# Altium PCB Mathis.PcbDoc
Units mm, origin at the board's own origin, x right, y up, seen from the top; angles counter-clockwise.
Board outline 70 x 50 mm, 4 copper layers (Top Layer, VCC, GND, Bottom Layer), stack 0.603 mm thick; 90 components, 67 nets, 353 pads, 95 vias.
Unrouted connection lines stored in the file: 33.
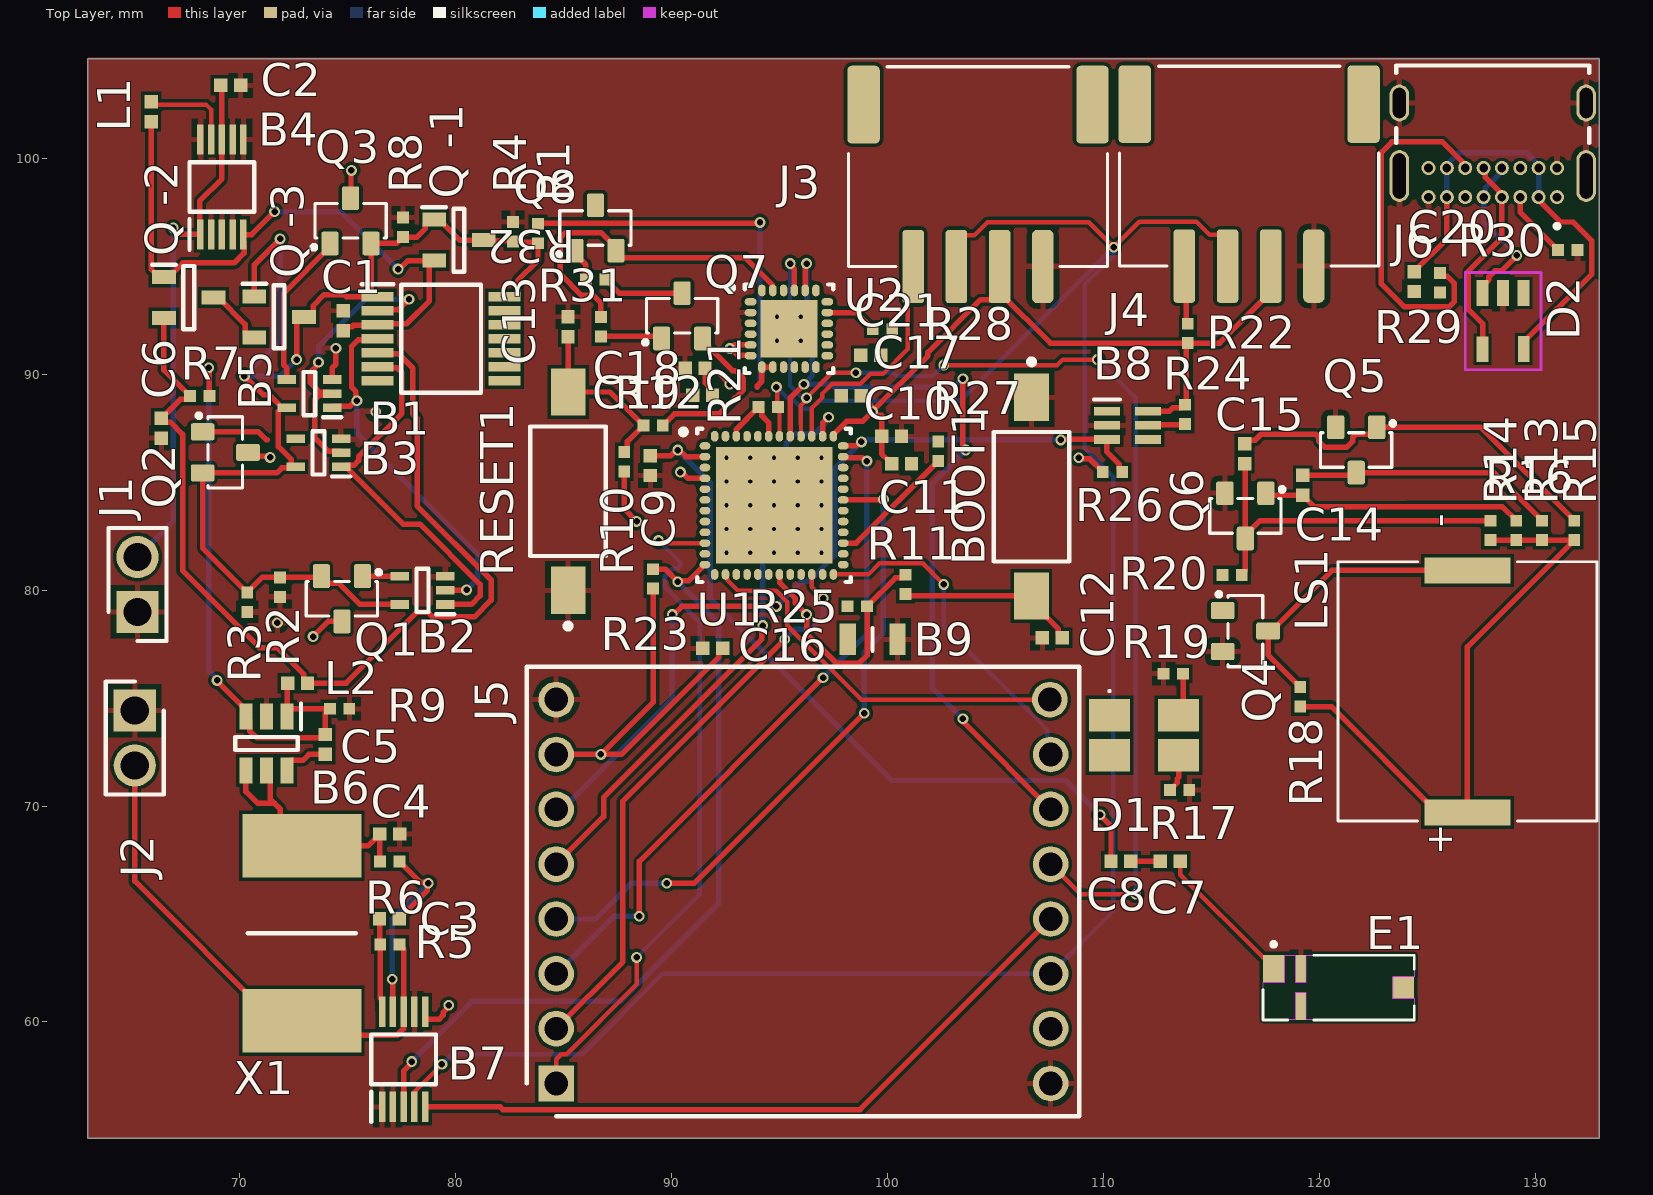
[diagram p0: Top Layer view]
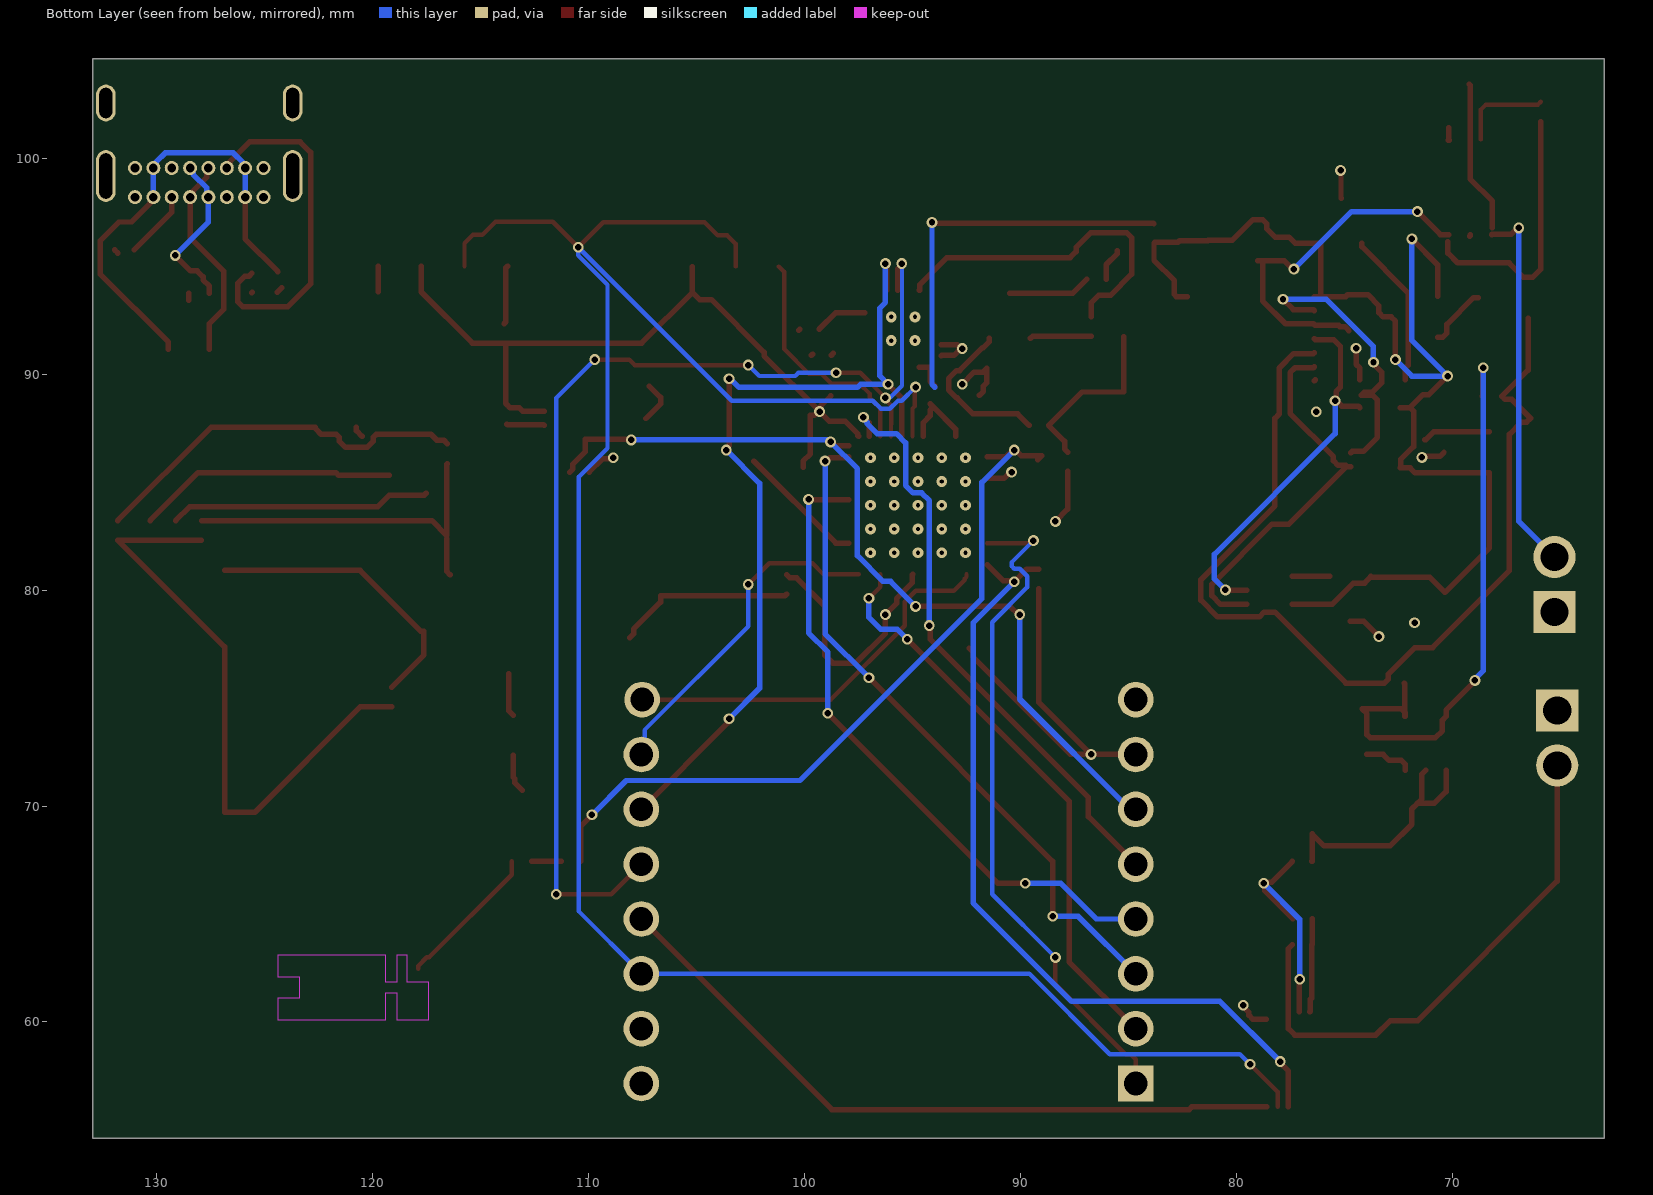
[diagram p1: Bottom Layer view, seen from below]
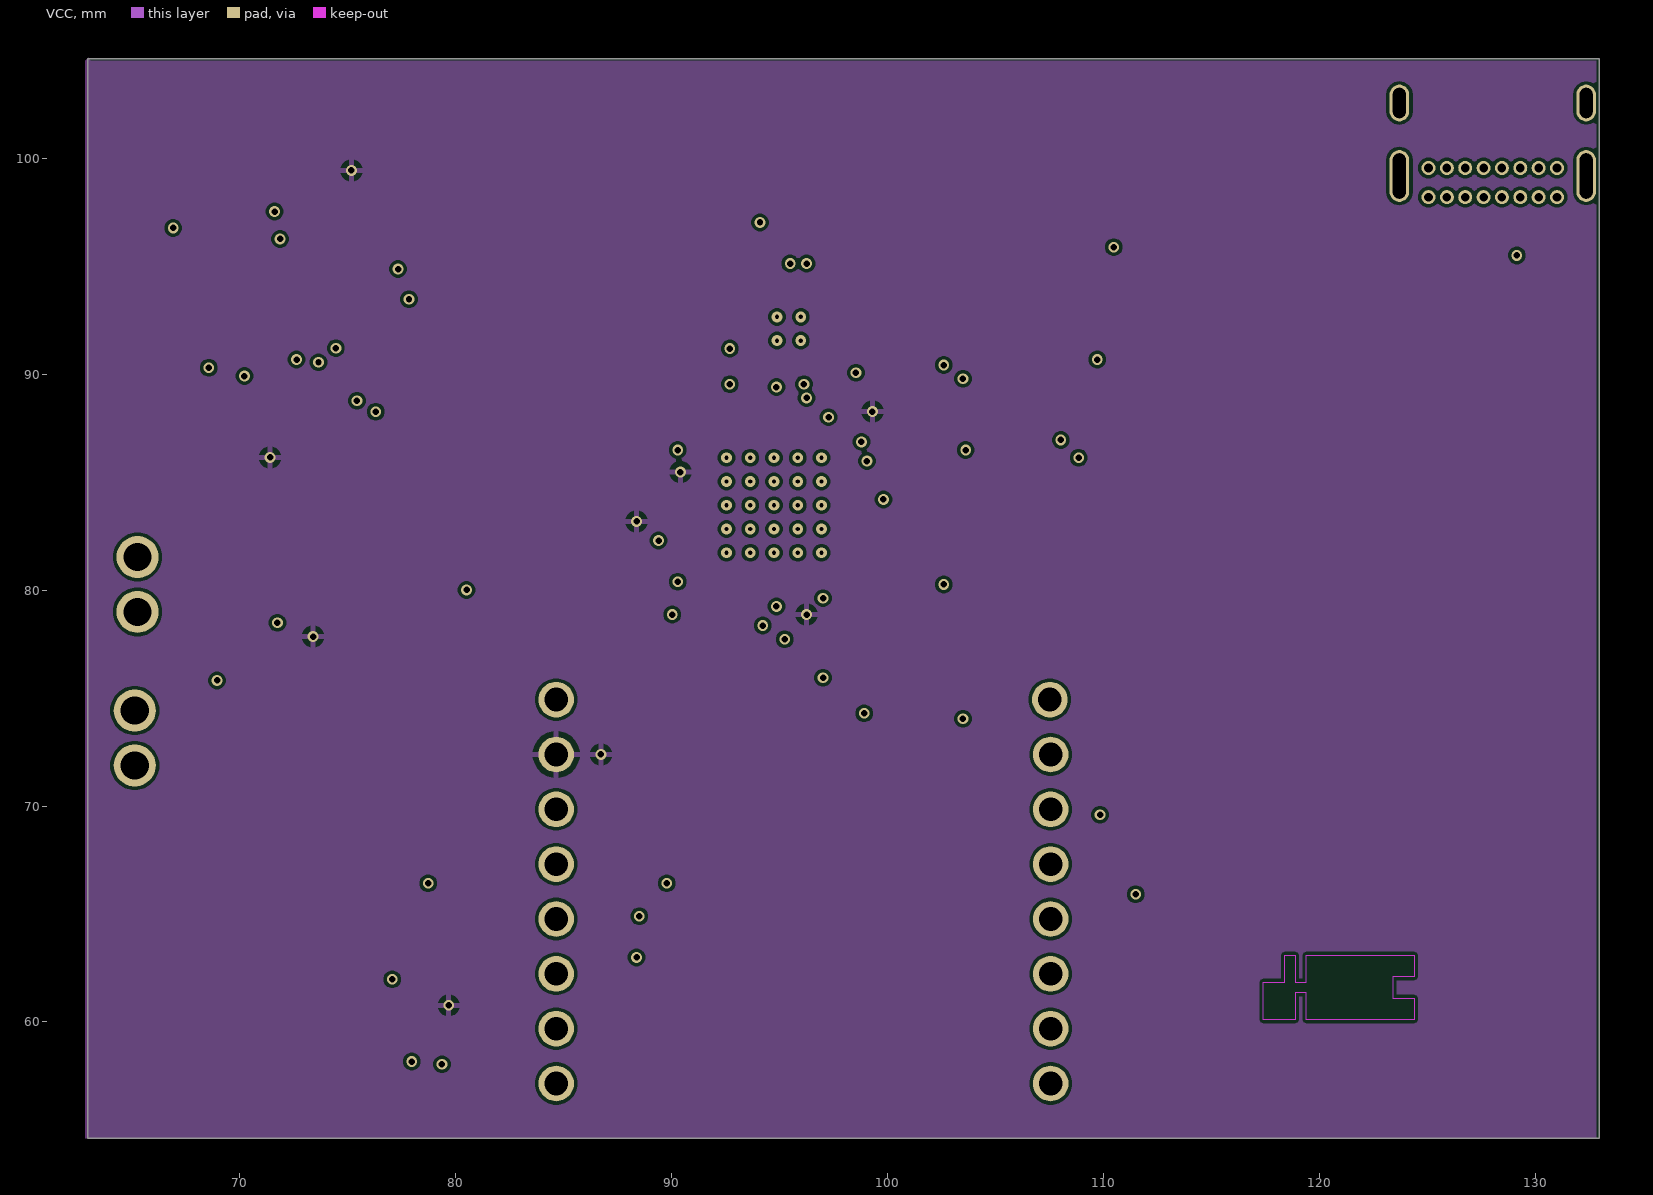
[diagram p2: VCC]
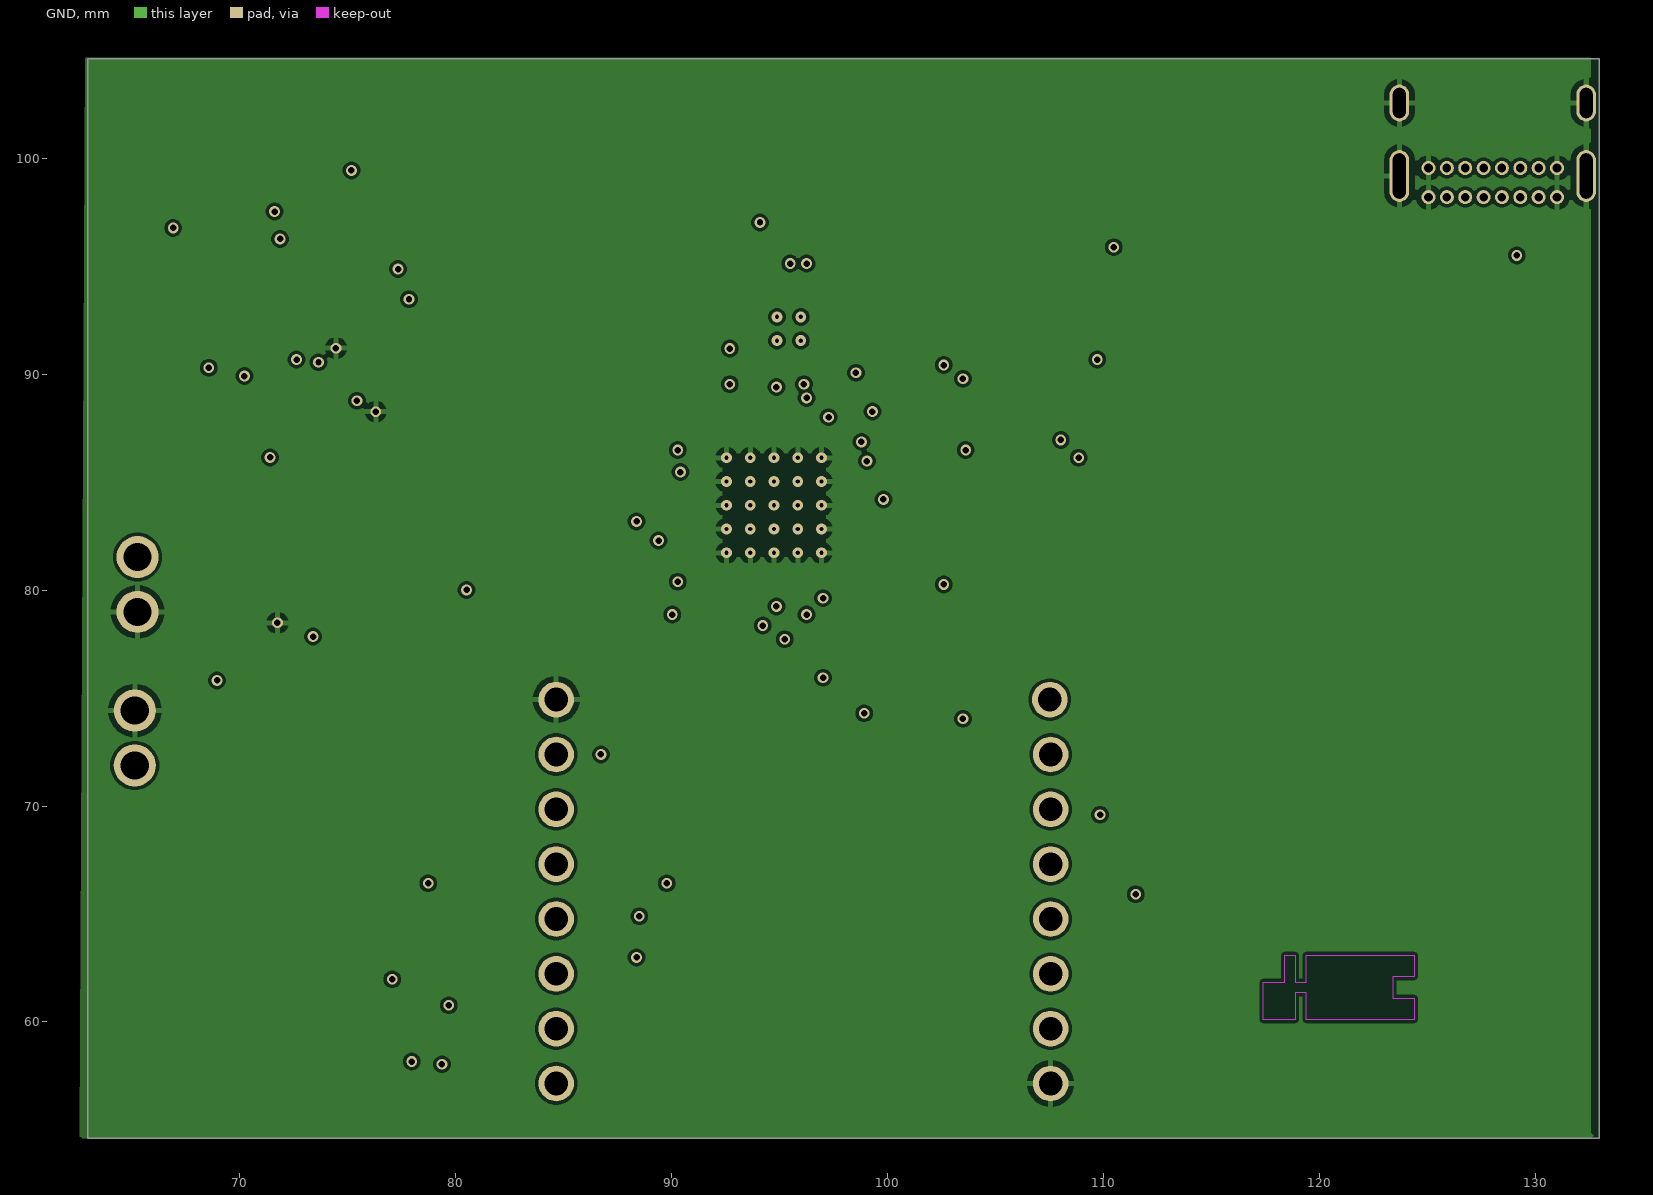
[diagram p3: GND]

## Layer stack, top to bottom
Top Solder: solder mask 0.0102, Solder Resist, Dk 3.5
Top Layer: signal copper 0.0356
Dielectric 2: prepreg 0.0711, PP-006, Dk 4.1
VCC: signal copper 0.035
Dielectric 1: dielectric 0.32, FR-4, Dk 4.8
GND: signal copper 0.035
Dielectric 3: prepreg 0.0711, PP-006, Dk 4.1
Bottom Layer: signal copper 0.0356
Bottom Solder: solder mask 0.0102, Solder Resist, Dk 3.5

## Board outline
62.969,54.61 62.969,104.61 132.969,104.61 132.969,54.61

## Design rules (kind name [scope] priority, off if disabled: settings)
Clearance Clearance_OLTTTPPP [OnOutside] p1: gap=0.15 ignorepadtopadclearanceinfootprint=TRUE
Clearance Clearance_ILTTTPPP [All] p2: gap=0.15 ignorepadtopadclearanceinfootprint=TRUE except(0.2: Arc-Hole Track-Hole SMDPad-Hole THPad-Hole Via-Hole Fill-Hole Poly-Hole Region-Hole)
HoleSize [All] p1: absolutevalues=TRUE maxlimit=1000 minlimit=0.25 maxpercent=80.000 minpercent=20.000
HoleToHoleClearance HoleToHoleClearance_uVia_same_layer_inner [IsMicroVia and ((StartLayer = 'Inner 1') and (StopLayer = 'Inner 2')) vs IsMicroVia and ((StartLayer = 'Inner 1') and (StopLayer = 'Inner 2'))] p1: gap=0.2 allowstackedmicrovias=FALSE
HoleToHoleClearance HoleToHoleClearance_uVia_same_layer_top [IsMicroVia and ((StartLayer = 'Top Layer') and (StopLayer = 'Inner 1')) vs IsMicroVia and ((StartLayer = 'Top Layer') and (StopLayer = 'Inner 1'))] p2: gap=0.2 allowstackedmicrovias=FALSE
HoleToHoleClearance HoleToHoleClearance_uVia [IsMicroVia vs IsMicroVia] p3: gap=0.01 allowstackedmicrovias=FALSE
HoleToHoleClearance [All] p4: gap=0.2 allowstackedmicrovias=FALSE
MinimumAnnularRing MinimumAnnularRing_uVia [IsMicroVia] p1: minimumring=0.09
MinimumAnnularRing MinimumAnnularRing_OAR [OnOutside] p2: minimumring=0.125
MinimumAnnularRing MinimumAnnularRing_IAR [All] p3: minimumring=0.125
PolygonConnect [All] p1: connectstyle=Relief reliefconductorwidth=0.254 reliefentries=4 polygonreliefangle="90 Angle" airgapwidth=0.254
RoutingVias RoutingVias_uVia [IsMicroVia] p1: holewidth=0.1 width=0.28 viastyle="Through Hole" minholewidth=0.1 minwidth=0.28 maxholewidth=0.1 maxwidth=0.28
RoutingVias [All] p2: holewidth=0.35 width=0.6 viastyle="Through Hole" minholewidth=0.25 minwidth=0.5 maxholewidth=3 maxwidth=3.25
SolderMaskExpansion [All] p1: expansion=0 istentingtop=FALSE
ViasUnderSMD [IsMicroVia] p1: allowed=TRUE
Width Width_ILTW [All] p1: maxlimit=3 minlimit=0.15 preferedwidth=0.15
28 further rules are at their usual default settings.

## Classes and differential pairs
component class UART: C18 C19 C20 C21 D2 Q7 Q8 R27 R28 R29 R30 R31 R32 U2
component class SPI: B8 B9 C17 R24 R25 R26
component class I2C: B7 C16 J3 J4 J5 R21 R22 R23
component class HIM: BOOT1 C12 C13 C14 C15 D1 LS1 Q4 Q5 Q6 R10 R11 R12 R13 R14 R15 R16 R17 R18 R19 R20 RESET1
component class ESP: C10 C11 U1
component class ANTENNE: C7 C8 C9 E1
component class ALIM_MOSFET: B1 B2 B3 B4 B5 B6 C1 C2 C3 C4 C5 C6 J1 J2 L1 L2 Q1 Q2 Q3 "Q -1" "Q -2" "Q -3" R1 R2 R3 R4 R5 R6 R7 R8 R9 X1

## Components (designator, comment, footprint, x,y, rotation, side; value= is the part's Value field where it differs from the comment)
B1 "74VHC05FT" SOP65P640X120-14N 79.336,91.644 r0 top
B2 "MC74VHC1GT08DFT2G" SOT65P210X110-5N 78.476,79.988 r180 top
B3 "MC74VHC1GT08DFT2G" SOT65P210X110-5N 73.66,86.36 r180 top
B4 "TPS62056DGSG4" SOP50P490X110-10N 69.184,98.67 r90 top
B5 "MC74VHC1GT08DFT2G" SOT65P210X110-5N 73.24,89.104 r180 top
B6 "LMR50410Y3FQDBVRQ1" SOT95P280X145-6N 71.247,72.898 r270 top
B7 "INA237AIDGST" SOP50P490X110-10N 77.602,58.27 r90 top
B8 "TMP126DCKR" SOT65P210X110-6N 111.125,87.63 r0 top
B9 "NB12K00103JBB" RESC2212X50N 99.321,77.724 r0 top
BOOT1 "FSMSM" TECO-FSMSM-2_V 106.68,84.328 r270 top
C1 "22uF" CAPC1005X06N 74.805,92.48 r90 top
C2 "2,2uF" CAPC1005X06N 69.596,103.378 r0 top
C3 "50uF" CAPC1005X06N 76.945,64.789 r0 top
C4 "2,2uF" CAPC1005X06N 76.962,68.707 r0 top
C5 "0,1uF" CAPC1005X06N 73.966,72.852 r270 top
C6 "10uF" CAPC1005X06N 66.382,87.501 r270 top
C7 "0,9pF" CAPC1005X06N 113.109,67.437 r180 top
C8 "0,6pF" CAPC1005X06N 110.823,67.437 r180 top
C9 "1pF" CAPC1005X06N 89.025,85.772 r90 top
C10 "10uF/6.3V(10%)" CAPC1005X06N 100.2,87.122 r180 top
C11 "0.1uF/6.3V(10%)" CAPC1005X06N 100.663,85.852 r180 top
C12 "1uF" CAPC1005X06N 107.647,77.787 r180 top
C13 "1uF" CAPC1005X06N 85.217,92.202 r90 top
C14 "0.01µF" CAPC1005X06N 119.24,84.856 r270 top
C15 "0.01µF" CAPC1005X06N 116.554,86.318 r270 top
C16 "100nF" CAPC1005X06N 91.914,77.304 r180 top
C17 "0.1µF" CAPC1005X06N 98.331,89.002 r180 top
C18 "1.5uF" CAPC1005X06N 91.101,90.277 r180 top
C19 "0.1uF" CAPC1005X06N 91.449,89.023 r180 top
C20 "1uF" CAPC1005X06N 124.399,94.291 r270 top
C21 "4.7uF" CAPC1005X06N 99.231,90.879 r0 top
D1 "598-8610-207F" 5988610207F 111.895,73.276 r0 top
D2 "824011" 824011 128.524,92.456 r180 top
E1 "NN03-320" XCVR_NN03-320 120.904,61.595 r180 top
J1 "61300211121" 61300211121 65.278,78.994 r90 top
J2 "61300211121" 61300211121 65.151,74.422 r270 top
J3 "114020164" 114020164 104.204,98.787 r180 top
J4 "114020164" 114020164 116.761,98.808 r180 top
J5 "825433-8" Connect-Mikrobus 84.669,57.15 r90 top
J6 "Use" USB4085-GF-A 128.043,102.562 r180 top
L1 "10uF" LQPC1005X06N 68.707,99.362 r270 top
L2 "3,3uH" LQPC1005X06N 75.486,78.486 r0 top
LS1 "PKLCS1212E40A1-R1" SPKR_PKLCS1212E40A1-R1 126.873,75.311 r90 top
Q1 "BSS123" BSS123 74.746,79.601 r180 top
Q2 "BSS123" BSS123 69.345,86.38 r270 top
Q3 "BSS123" BSS123 75.145,97.105 r0 top
Q4 "SS8050-G" SS8050-G 116.586,78.105 r270 top
Q5 "SS8050-G" SS8050-G 121.719,86.494 r180 top
Q6 "SS8050-G" SS8050-G 116.586,83.439 r180 top
Q7 "SS8050-G" SS8050-G 90.499,92.706 r0 top
Q8 "SS8050-G" SS8050-G 86.487,96.774 r0 top
"Q -1" "FDV304P" SOT95P251X112-3N 80.165,96.208 r0 top
"Q -2" "FDV304P" SOT95P251X112-3N 67.652,93.549 r0 top
"Q -3" "FDV304P" SOT95P251X112-3N 71.836,92.66 r0 top
R1 "2K" RESC1005X06N 83.825,96.517 r270 top
R2 "1K" RESC1005X06N 71.882,80.137 r270 top
R3 "10K" RESC1005X06N 70.358,79.444 r270 top
R4 "10K" RESC1005X06N 82.671,96.603 r90 top
R5 "50ohm" RESC1005X06N 76.968,63.585 r180 top
R6 "50ohm" RESC1005X06N 76.962,67.437 r0 top
R7 "10K" RESC1005X06N 68.163,88.984 r0 top
R8 "10K" RESC1005X06N 77.574,96.804 r90 top
R9 "90K" RESC1005X06N 74.637,74.506 r0 top
R10 "10kΩ" RESC1005X06N 87.821,85.947 r270 top
R11 "10kΩ" RESC1005X06N 100.838,80.264 r90 top
R12 "0Ω" RESC1005X06N 89.154,87.63 r0 top
R13 "510Ω" RESC1005X06N 130.318,82.767 r270 top
R14 "20kΩ" RESC1005X06N 129.134,82.767 r270 top
R15 "20kΩ" RESC1005X06N 131.818,82.767 r270 top
R16 "510Ω" RESC1005X06N 127.939,82.767 r270 top
R17 "150Ω" RESC1005X06N 113.538,70.739 r180 top
R18 "1kΩ" RESC1005X06N 119.126,75.057 r270 top
R19 "150Ω" RESC1005X06N 113.25,76.13 r0 top
R20 "1kΩ" RESC1005X06N 115.969,80.709 r180 top
R21 "2kΩ" RESC1005X06N 94.49,88.483 r0 top
R22 "2kΩ" RESC1005X06N 113.919,91.89 r90 top
R23 "10kΩ" RESC1005X06N 89.154,80.518 r90 top
R24 "10kΩ" RESC1005X06N 113.792,88.138 r90 top
R25 "10kΩ" RESC1005X06N 98.617,79.255 r180 top
R26 "10kΩ" RESC1005X06N 110.432,85.471 r180 top
R27 "4.7k" RESC1005X06N 102.362,86.429 r90 top
R28 "10k" RESC1005X06N 99.781,92.083 r0 top
R29 "5.1k" RESC1005X06N 125.603,94.234 r270 top
R30 "5.1k" RESC1005X06N 131.514,95.758 r0 top
R31 "10k" RESC1005X06N 86.741,92.202 r270 top
R32 "10k" RESC1005X06N 86.491,94.395 r180 top
RESET1 "FSMSM" TECO-FSMSM-2_V 85.217,84.582 r90 top
U1 "ESP32-PICO-D4" PQFN50P700X700X104_HS-49N 94.758,83.929 r0 top
U2 "CP2104-F03-GM" PQFN50P400X400X80_HS-25N 95.448,92.106 r0 top
X1 "PSR400ITQFF0L50" RESC10052X200N 72.889,64.106 r90 top

## Footprints (in the part's own frame and the unit in brackets; to place one, negate y for a bottom-side part, rotate by r counter-clockwise, add the part's x,y. Pads: shape width x height; smd on the part's side, far side on the other; paste and mask are expansions set on the pad)
824011 [mil] "Suppresseurs ESD / diodes TVS WE-TVS High Speed 5uA 5VDC 2+1"
  rect 21.65x47.24 smd: 1(-37.4,-51.18) 2(0,-51.18) 3(37.4,-51.18) 4(37.4,51.18) 5(-37.5,51)
  Top Layer keep-out lines w5: 68.9,88.58 68.9,-88.58 -68.9,-88.58 -68.9,88.58 68.9,88.58
  body extent -57,-55 57,55, height 57
114020164 [mm]
  rrect50% 1x3.4 smd: 1(-3,3.8)
  rrect30% 1x3.4 smd: 2(-1,3.8) 3(1,3.8) 4(3,3.8)
  rrect26% 1.5x3.6 smd: MP1(-5.3,-3.7) MP2(5.3,-3.7)
  silkscreen extent -6,-5.45 6,3.8, body extent -6.1,-5.59 5.9,4.59, height 5.2
5988610207F [mm]
  rect 1.9x1.5 smd: 1(-1.6,0.925) 2(1.6,0.925) 3(-1.6,-0.925) 4(1.6,-0.925)
  silkscreen extent -1.65,2 -1.55,2.1, body extent -1.6,-1.35 1.6,1.35, height 0.9
61300211121 [mm] "Embases et logements de câbles WR-PHD 2.54mm 2Pin T HT Header"
  rect 1.95x1.95 / inner round 1.95 / far side rect 1.95x1.95 hole 1.3: 1(0,0)
  round 1.95 hole 1.3: 2(2.54,0)
  silkscreen extent -1.35,-1.35 3.89,1.35
BSS123 [mm]
  rrect25% 0.8x1.1 smd paste+0 mask+0.075: 1(-0.95,-1.05) 2(0.95,-1.05) 3(0,1.05)
  silkscreen extent -1.77,-1.3 1.65,0.8, body extent -1.5,-1.3 1.5,1.3, height 1.1
CAPC1005X06N [mm] "Chip Capacitor, 2-Leads, Body 1,00x0,50mm, IPC Medium Density"
  rect 0.62x0.62 smd: 1(-0.46,0) 2(0.46,0)
  body extent -0.53,-0.28 0.53,0.28, height 0.55
Connect-Mikrobus [mm]
  rect 1.65x1.65 / inner round 1.65 / far side rect 1.65x1.65 hole 1.1: 1(0,0)
  round 1.65 hole 1.1: 2(2.54,0) 3(5.08,0) 4(7.62,0) 5(10.16,0) 6(12.7,0) 7(15.24,0) 8(17.78,0) 9(17.78,-22.86) 10(15.24,-22.9) 11(12.7,-22.9) 12(10.16,-22.9) 13(7.62,-22.9) 14(5.08,-22.9) 15(2.54,-22.9) 16(0,-22.9)
  silkscreen extent -1.52,-24.22 19.3,1.37, body extent -1.37,-24.18 19.14,1.28, height 6.7
LQPC1005X06N [mm]
  rect 0.62x0.62 smd: 1(-3.254,-2.794) 2(-2.334,-2.794)
  body extent -3.32,-3.07 -2.27,-2.52, height 0.55
PQFN50P400X400X80_HS-25N [mm] "PQFN, 24-Leads, Body 4,00x4,00mm, Pitch 0,50mm, Thermal Pad 2,65x2,65mm, IPC Medium Density"
  oval 0.55x0.35 smd: 1(-1.775,1.25) 2(-1.775,0.75) 3(-1.775,0.25) 4(-1.775,-0.25) 5(-1.775,-0.75) 6(-1.775,-1.25) 13(1.775,-1.25) 14(1.775,-0.75) 15(1.775,-0.25) 16(1.775,0.25) 17(1.775,0.75) 18(1.775,1.25)
  oval 0.35x0.55 smd: 7(-1.25,-1.775) 8(-0.75,-1.775) 9(-0.25,-1.775) 10(0.25,-1.775) 11(0.75,-1.775) 12(1.25,-1.775) 19(1.25,1.775) 20(0.75,1.775) 21(0.25,1.775) 22(-0.25,1.775) 23(-0.75,1.775) 24(-1.25,1.775)
  rect 2.65x2.65 smd: 25(0,0)
  silkscreen extent -2.82,-2.05 2.05,2.05, body extent -2.05,-2.05 2.05,2.05, height 0.8
PQFN50P700X700X104_HS-49N [mm] "PQFN, 48-Leads, Body 7,00x7,00mm, Pitch 0,50mm, Thermal Pad 5,40x5,40mm, IPC Medium Density"
  oval 0.5x0.35 smd: 1(-3.2,2.75) 2(-3.2,2.25) 3(-3.2,1.75) 4(-3.2,1.25) 5(-3.2,0.75) 6(-3.2,0.25) 7(-3.2,-0.25) 8(-3.2,-0.75) 9(-3.2,-1.25) 10(-3.2,-1.75) 11(-3.2,-2.25) 12(-3.2,-2.75) 25(3.2,-2.75) 26(3.2,-2.25) 27(3.2,-1.75) 28(3.2,-1.25) 29(3.2,-0.75) 30(3.2,-0.25) 31(3.2,0.25) 32(3.2,0.75) 33(3.2,1.25) 34(3.2,1.75) 35(3.2,2.25) 36(3.2,2.75)
  oval 0.35x0.5 smd: 13(-2.75,-3.2) 14(-2.25,-3.2) 15(-1.75,-3.2) 16(-1.25,-3.2) 17(-0.75,-3.2) 18(-0.25,-3.2) 19(0.25,-3.2) 20(0.75,-3.2) 21(1.25,-3.2) 22(1.75,-3.2) 23(2.25,-3.2) 24(2.75,-3.2) 37(2.75,3.2) 38(2.25,3.2) 39(1.75,3.2) 40(1.25,3.2) 41(0.75,3.2) 42(0.25,3.2) 43(-0.25,3.2) 44(-0.75,3.2) 45(-1.25,3.2) 46(-1.75,3.2) 47(-2.25,3.2) 48(-2.75,3.2)
  rect 5.4x5.4 smd: 49(0,0)
  silkscreen extent -4.32,-3.55 3.55,3.55, body extent -3.55,-3.55 3.55,3.55, height 1.04
RESC1005X06N [mm] "Chip Resistor, 2-Leads, Body 1,00x0,50mm, IPC Medium Density"
  rect 0.55x0.55 smd: 1(-0.45,0) 2(0.45,0)
  body extent -0.53,-0.28 0.53,0.28, height 0.55
RESC2212X50N [mm]
  rect 0.75x1.45 smd: 1(-1.15,0) 2(1.15,0)
  silkscreen extent 0,-0.53 0,0.53, body extent -1.07,-0.63 1.07,0.63, height 0.5
RESC10052X200N [mm]
  rect 2.95x5.5 smd: 1(-4.05,0) 2(4.05,0)
  silkscreen extent 0,-2.5 0,2.5, body extent -5,-2.6 5,2.6, height 2
SOP50P490X110-10N [mm]
  rect 1.4x0.3 smd: 1(-2.2,1) 2(-2.2,0.5) 3(-2.2,0) 4(-2.2,-0.5) 5(-2.2,-1) 6(2.2,-1) 7(2.2,-0.5) 8(2.2,0) 9(2.2,0.5) 10(2.2,1)
  silkscreen extent -2.9,-1.5 1.15,1.5, body extent -2.46,-1.5 2.46,1.5, height 1.06
SOP65P640X120-14N [mm]
  rect 1.475x0.45 smd: 1(-2.938,1.95) 2(-2.938,1.3) 3(-2.938,0.65) 4(-2.938,0) 5(-2.938,-0.65) 6(-2.938,-1.3) 7(-2.938,-1.95) 8(2.938,-1.95) 9(2.938,-1.3) 10(2.938,-0.65) 11(2.938,0) 12(2.938,0.65) 13(2.938,1.3) 14(2.938,1.95)
  silkscreen extent -3.67,-2.5 1.85,2.52, body extent -3.1,-2.75 3.3,2.75, height 1.1
SOT65P210X110-5N [mm]
  rect 0.85x0.4 smd: 1(-1.05,0.65) 2(-1.05,0) 3(-1.05,-0.65) 4(1.05,-0.65) 5(1.05,0.65)
  silkscreen extent -1.48,-1 0.28,1.1, body extent -0.95,-1 1.15,1, height 1.1
SOT65P210X110-6N [mm]
  rect 1.2x0.4 smd: 1(-0.95,0.65) 2(-0.95,0) 3(-0.95,-0.65) 4(0.95,-0.65) 5(0.95,0) 6(0.95,0.65)
  silkscreen extent -1.55,1.2 -0.35,1.2, body extent -1.05,-1 1.05,1, height 1
SOT95P251X112-3N [mm]
  rect 1.1x0.65 smd: 1(-1.15,0.95) 2(-1.15,-0.95) 3(1.15,0)
  silkscreen extent -1.7,-1.46 0.25,1.53, body extent -1.25,-1.46 1.25,1.46, height 1.12
SOT95P280X145-6N [mm]
  rect 1.2x0.6 smd: 1(-1.25,0.95) 2(-1.25,0) 3(-1.25,-0.95) 4(1.25,-0.95) 5(1.25,0) 6(1.25,0.95)
  silkscreen extent -1.85,-1.45 0.3,1.6, body extent -1.4,-1.45 1.4,1.45, height 1.2
SPKR_PKLCS1212E40A1-R1 [mm]
  rect 1.2x4 smd: N(5.6,0) P(-5.6,0)
  silkscreen extent -6,-6 6,6, body extent -6,-6 6,6, height 3
SS8050-G [mm]
  rrect25% 0.8x1.1 smd paste+0 mask+0.075: 1(-0.95,-1.05) 2(0.95,-1.05) 3(0,1.05)
  silkscreen extent -1.77,-1.3 1.65,0.8, body extent -1.5,-1.3 1.5,1.3, height 1.1
TECO-FSMSM-2_V [mm] "SMD, 2-Leads, Body 6x3.5mm, Pitch 9.19mm"
  rect 2.2x1.6 smd: 1(-4.595,0)
  rect 2.18x1.6 smd: 2(4.595,0)
  silkscreen extent -6.37,-1.75 3,1.75, body extent -4.98,-1.75 4.98,1.75, height 4.4
USB4085-GF-A [mm]
  round 0.65 hole 0.4: A1(-2.975,4.36) A4(-2.125,4.36) A5(-1.275,4.36) A6(-0.425,4.36) A7(0.425,4.36) A8(1.275,4.36) A9(2.125,4.36) A12(2.975,4.36) B1(2.975,3.01) B4(2.125,3.01) B5(1.275,3.01) B6(0.425,3.01) B7(-0.425,3.01) B8(-1.275,3.01) B9(-2.125,3.01) B12(-2.975,3.01)
  oval 0.9x1.7 hole 0.6 slot 1.4 at 90 deg: S1(-4.325,0) S2(4.325,0)
  oval 0.9x2.4 hole 0.6 slot 2.1 at 90 deg: S3(-4.325,3.38) S4(4.325,3.38)
  silkscreen extent -4.47,-1.74 4.47,5.8, body extent -4.47,-4.25 4.47,4.92, height 3.46
XCVR_NN03-320 [mm]
  rect 1x1 smd: 1(-3,0)
  rect 0.5x1.25 smd: 2(1.75,-0.875) 4(1.75,0.875)
  rect 1x1.25 smd: 3(3,-0.875)
  Keep-Out Layer region: 3.5,-0.25 2.5,-0.25 2.5,-1.5 2,-1.5 2,-0.25 1.5,-0.25 1.5,-1.5 -3.5,-1.5 -3.5,-0.5 -2.5,-0.5 -2.5,0.5 -3.5,0.5 -3.5,1.5 1.5,1.5 1.5,0.25 2,0.25 2,1.5 3.5,1.5
  silkscreen extent -3.5,-2.1 3.5,1.5, body extent -3.5,-1.5 3.5,1.5, height 2.02

## Part data
B1: "Logic Gates CMOS LOGIC IC INVERTER", Manufacturer_Name=Toshiba, Mouser Part Number=757-74VHC05FT, Manufacturer_Part_Number=74VHC05FT
B2 B3 B5: "Single 2-Input AND Gate, TTL Level", Manufacturer_Name=onsemi, Manufacturer_Part_Number=MC74VHC1GT08DFT2G
B4: "TEXAS INSTRUMENTS - TPS62056DGSG4 - Synchronous Buck (Step Down) Switching Regulator, Fixed, 2.7V-10Vin, 3.3V/0.8A out, 850kHz, VSSOP-10", Manufacturer_Name="Texas Instruments", Mouser Part Number=595-TPS62056DGSG4, Manufacturer_Part_Number=TPS62056DGSG4
B6: "Régulateurs de tension de commutation Automotive qualified SIMPLE SWITCHER 4-V to 36-V, 1-A synchronous step-down converter 6-SOT-23 -40 to 150", Manufacturer_Name="Texas Instruments", Mouser Part Number=595-R50410Y3FQDBVRQ1, Manufacturer_Part_Number=LMR50410Y3FQDBVRQ1
B7: "Current Sense Amplifiers 85-V, 16-bit, I2C output current/voltage/power monitor with alert 10-VSSOP -40 to 125", Manufacturer_Name="Texas Instruments", Mouser Part Number=595-INA237AIDGST, Manufacturer_Part_Number=INA237AIDGST
B8: "Board Mount Temperature Sensors +/-0.25 C SPI temperature sensor with 175 C operation, CRC and slew-rate alert", Manufacturer_Name="Texas Instruments", Mouser Part Number=595-TMP126DCKR, Manufacturer_Part_Number=TMP126DCKR
B9: "NTC SMD Thermistor, NB12K, 10K, 5% AVX 10k 0805 Protection NTC Thermistor, 5s, 2 x 1.25 x 1.3mm", Manufacturer_Name="Kyocera AVX", Mouser Part Number=581-NB12K00103JBB, Arrow Part Number=NB12K00103JBB, Arrow Price/Stock=https://www.arrow.com/en/products/nb12k00103jbb/avx, Datasheet Link=https://datasheet.datasheetarchive.com/originals/distributors/Datasheets-DGA6/551314.pdf, Geometry.Height=0.5mm, Manufacturer_Part_Number=NB12K00103JBB, Mouser Price/Stock=https://www.mouser.co.uk/ProductDetail/AVX/NB12K00103JBB/?qs=4%252B6%252BTdINQeDPvI%252BQUQjJ3Q%3D%3D
BOOT1 RESET1: library part CMP-2000-07511-1, "FSMSM Push Button Switch, 50 mA, -35 to 85 degC, 2-Pin SMD, RoHS, Bulk", Case\/Package=SMD/SMT, Contact Current Rating=50mA, Contact Resistance=100mOhm, Manufacturer="TE Connectivity", Max Operating Temperature=85degC, Max Voltage Rating (DC)=12V, Min Operating Temperature=-35degC, Operating Force=180gf, Package Description="2-Pin Surface Mount Device, Body 6 x 3.5 mm, Pitch 9.19 mm", Package Quantity=1000, Voltage Rating (DC)=24V, Actuator Length=1.07mm, Actuator Material=Polyamide, Contact Material=Brass, Contact Plating=Silver, Current Rating=50mA, Datasheet URL=http://www.te.com/commerce/DocumentDelivery/DDEController?Action=showdoc&DocId=Customer+Drawing%7F1437566-3%7FC2%7Fpdf%7FEnglish%7FENG_CD_1437566-3_C2_1437566_3_1_c.dwg.pdf%7F1437566-3, Datasheet Version="Rev. C2, 08/2014", Electrical Life=20000Cycles, ELV=Compliant, Illumination Type=Illuminated, Lead Free=LeadFree, Manufacturer URL=http://www.te.com/, Mechanical Life=20000Cycles, Mount=SurfaceMount, Mounting Technology=SurfaceMount, Orientation=Straight, Package Reference=FSMSM, Packaging=LoosePiece, REACH SVHC=Unknown, RoHSCompliant=true, Switch Travel=0.25mm, Termination=GullWing, Throw Configuration=SPST
C1 C2 C3 C4 C5 C6 C7 C8 C9 C10 C11 C12 C13 C14 C15 C16 C17 C18 C19 C20 C21: library part Capacitor
D1: "Standard LEDs - SMD Red/Green WC 80/50mcd 645/570nm", Manufacturer_Name=Dialight, Mouser Part Number=645-598-8610-207F, Arrow Part Number=598-8610-207F, Arrow Price/Stock=https://www.arrow.com/en/products/598-8610-207f/dialight?region=nac, Datasheet Link=https://media.digikey.com/pdf/Data%20Sheets/Dialight%20PDFs/598%20Series%201210%20Pkg%20Bi-Color.pdf, Geometry.Height=0.8mm, Manufacturer_Part_Number=598-8610-207F, Mouser Price/Stock=https://www.mouser.co.uk/ProductDetail/Dialight/598-8610-207F?qs=7JStj%2FjQ2SFuCjosqwklHQ%3D%3D
D2: "TVS Diode Array WE-TVS, High Speed Series  - Low capazity - No leakage current - Low clamping voltage - high ESD voltage protection  -- USB 1.0 - 2.0"
E1: "Dual port antenna booster for GNSS, Bluetooth, 5G and UWB (1561 - 1606MHz, 2400 - 2500MHz, 3400 - 3800MHz, 3100 - 4800MHz and 6000 - 10600 MHz), signal booster", Manufacturer_Name=Ignion, Mouser Part Number=128-NN03-320, Manufacturer_Part_Number=NN03-320
J1 J2: "WURTH ELEKTRONIK - 61300211121 - HEADER, 2.54MM, PIN, THT, VERTICAL, 2WAY"
J3 J4: "Seeed Studio Accessories Grove Female Header - SMD-4P-2.0mm-90D-20Pcs", Manufacturer_Name="Seeed Studio", Mouser Part Number=713-114020164, Manufacturer_Part_Number=114020164
J5: library part Connect-Mikrobus, "Headers & Wire Housings 8P double for connection mikrobus", Manufacturer_Name="TE Connectivity", Mouser Part Number=571-825433-8, Manufacturer_Part_Number=825433-8
J6: library part USB4085-GF-A, "Connecteurs USB USB Type C, 2.0, Rec, TH , G/F, RA , Top Mnt, T & R"
L1 L2: library part Bobine
LS1: "Buzzers Transducer, Externally Driven Piezo 1.5V 2kHz 70dB @ 1.5V, 10cm Surface Mount Solder Pads", Package=None, Availability=Unavailable, MF="Murata Electronics", MP=PKLCS1212E40A1-R1, Price=None
Q1 Q2 Q3: "BSS123 N-Channel MOSFET, 170 mA, 100 V PowerTrench, 3-Pin SOT-23 ON Semiconductor"
Q4 Q5 Q6 Q7 Q8: "Bipolar Transistors - BJT NPN TRANSISTOR 1.5A 40V"
"Q -1" "Q -2" "Q -3": "ON SEMICONDUCTOR - FDV304P - Power MOSFET, P Channel, 25 V, 460 mA, 1.22 ohm, SOT-23, Surface Mount", Manufacturer_Name=onsemi, Mouser Part Number=512-FDV304P, Arrow Part Number=FDV304P, Arrow Price/Stock=https://www.arrow.com/en/products/fdv304p/on-semiconductor?utm_currency=USD&region=europe, Datasheet Link=https://componentsearchengine.com/Datasheets/2/FDV304P.pdf, Geometry.Height=1.12mm, Manufacturer_Part_Number=FDV304P, Mouser Price/Stock=https://www.mouser.co.uk/ProductDetail/onsemi-Fairchild/FDV304P?qs=FOlmdCx%252BAA1BAlCQZu888w%3D%3D
R1 R2 R3 R4 R5 R6 R7 R8 R9 R10 R11 R12 R13 R14 R15 R16 R17 R18 R19 R20 R21 R22 R23 R24 R25 R26 R27 R28 R29 R30 R31 R32: library part Resistor
U1: library part ESP32, "Système RF sur puce - SoC SIP module ESP32 with 4MByte Flash, Dual Core MCU, Wi-Fi & Bluetooth Combo, LGA48-pin, 7*7mm", Manufacturer 1="Espressif Systems", Supplier Part Number 1=1904-1029-1-ND, Manufacturer Part Number 1=ESP32-PICO-D4, Supplier 1=Digi-Key
U2: library part USBBridge, "USB Bridge, USB to UART USB 2.0 UART Interface 24-QFN (4x4)", Manufacturer 1="Silicon Labs", Manufacturer Part Number 1=CP2104-F03-GM, Supplier 1="Arrow Electronics", Supplier Part Number 1=CP2104-F03-GM
X1: "ROHM - PSR400ITQFF0L50 - SMD Current Sense Resistor, 500 ohm, PSR Series, 3921 [1052 Metric], 4 W, +/- 1%, Metal Strip", Manufacturer_Name="ROHM Semiconductor", Mouser Part Number=755-PSR400ITQFF0L50, Datasheet Link=https://componentsearchengine.com/Datasheets/2/PSR400ITQFF0L50.pdf, Geometry.Height=2mm, Manufacturer_Part_Number=PSR400ITQFF0L50, Mouser Price/Stock=https://www.mouser.co.uk/ProductDetail/ROHM-Semiconductor/PSR400ITQFF0L50?qs=493kPxzlxfLaT1w5Mo%252BtHg%3D%3D

## Via types
v1: diameter 0.5, hole 0.3, Top Layer to Bottom Layer, 66 vias
v2: diameter 0.5, hole 0.2, Top Layer to Bottom Layer, 29 vias

## Nets (pads, with @x,y where several pads share a name; then routed paths per layer and width w, separated by ;. In a path a pad name is that pad's centre, name@x,y a point inside that pad or via, vN(x,y) a via of type N, cw(c..) or ccw(c..) an arc to the next point about the centre after c; other vN are vias at no path point)
3V3: B7.6 B8.6 C10.2 C11.2 C16.1 C17.1 J3.2 J4.2 J5.7 Q1.3 Q2.3 Q3.3 R10.2 R11.2 R21.1 R22.1 R23.1 R24.2 R25.1 U1.1 U1.3 U1.4 U1.19 U1.37 U1.43 U1.46 | length 79.1
  Top Layer w0.254: Q2.3 70.58,86.195 71.369,86.195 v1(71.416,86.148) ; v1(73.406,77.851) 74.106,78.551 Q1.3 ; Q3.3 75.164,98.175 75.164,99.421 v1(75.184,99.441) ; B7.6@78.618,60.134 79.257,60.134 79.436,60.313 79.436,60.45 79.691,60.705 v1(79.691,60.771) ; J5.7 v1(86.741,72.39) ; R10.2 87.821,83.756 v1(88.392,83.185) ; R23.1 89.154,74.803 v1(86.741,72.39) ; v1(90.422,85.469) 90.489,85.469 90.779,85.179 U1.4 ; C16.1 92.191,77.121 92.191,76.882 87.699,72.39 v1(86.741,72.39) ; U1.46 93.008,87.452 R21.1 ; R21.1@94.188,88.631 R21.1 ; U1.43 94.508,87.76 94.188,88.081 94.188,88.335 R21.1 ; U1.19 95.026,80.711 95.026,80.335 95.749,79.613 95.749,79.384 v1(96.266,78.867) 96.266,77.99 97.638,76.618 98.704,76.618 99.067,76.981 R25.1 100.379,80.566 100.69,80.566 R11.2 ; U1.37 97.539,87.161 97.539,87.236 98.119,87.815 98.858,87.815 v1(99.314,88.271) ; C17.1 99.267,88.526 99.267,88.318 v1(99.314,88.271) ; C10.2 99.74,86.315 100.076,85.979 C11.2@100.076,85.682 ; C10.2 C10.2 99.741,88.092 99.56,88.092 99.381,88.271 v1(99.314,88.271) ; J3.2@105.204,93.827 J3.2 ; B8.6 113.056,88.28 113.216,88.44 113.644,88.44 R24.2 113.855,88.652 113.855,91.376 R22.1 ; J4.2 117.761,93.808 115.393,91.44 R22.1 ; v1(99.314,88.271) 99.314,88.287 101.881,90.854 101.881,91.014 104.323,93.456 104.872,93.456 105.204,93.787 107.551,91.44 R22.1
GND: B1.7 B2.3 B3.3 B4.2 B4.3 B4.4 B4.6 B4.7 B4.10 B5.3 B6.2 B7.1 B7.2 B7.7 B8.2 B9.2 BOOT1.1 C1.2 C2.2 C4.2 C6.2 C9.1 C10.1 C11.1 C12.2 C13.2 C16.2 C17.2 C18.2 C19.2 C20.2 C21.2 D2.2 E1.2 J1.1 J2.1 J3.1 J4.1 J5.8 J5.16 J6.A1 J6.A12 J6.B1 J6.B12 J6.S1 J6.S2 J6.S3 J6.S4 Q4.2 Q5.2 Q6.2 R2.2 R3.2 R4.2 R8.2 R9.2 R17.1 R19.1 R28.2 R29.2 R30.2 RESET1.1 U1.49 U2.2 | length 9.1
  Top Layer w0.254: B4.3 69.184,96.416 B4.3@69.207,96.393 ; B4.6@70.161,100.838 70.184,100.861 B4.6 ; B4.6@70.184,101.42 B4.6 ; B4.6@70.207,100.847 B4.6 ; B5.3 74.29,90.289 74.464,90.462 v1(74.464,91.207) ; B1.7@76.354,89.738 B1.7 ; C21.2@99.638,90.932 C21.2 ; R28.2 R28.2@100.284,92.03 ; BOOT1.1@107.204,89.447 BOOT1.1 106.68,88.623 BOOT1.1@107.353,87.95 ; J4.1@119.761,93.808 J4.1 ; Q5.2@120.496,87.121 120.769,87.394 Q5.2 ; J6.S4@123.718,98.857 J6.S4@124.017,98.559 ; C20.2@124.216,94.014 C20.2 C20.2@124.423,93.808 ; J6.A12@124.961,98.202 J6.A12 ; J6.B1@124.961,99.552 J6.B1 ; R29.2@125.579,93.808 R29.2 ; D2.2@128.524,93.431 D2.2 ; R30.2@131.816,95.61 R30.2
  Bottom Layer w0.254: J6.S2@123.718,102.162 J6.S2 ; J6.A1@130.942,98.126 J6.A1 J6.A1@131.125,98.202 ; J6.B12 J6.B12@131.125,99.552 ; J6.S3@132.07,98.559 132.368,98.857 J6.S3
  other v1: 71.755,78.486 76.312,88.265
  other v2: 92.558,81.729 93.658,81.729 94.758,81.729 95.858,81.729 96.958,81.729 92.558,82.829 93.658,82.829 94.758,82.829 95.858,82.829 96.958,82.829 92.558,83.929 93.658,83.929 94.758,83.929 95.858,83.929 96.958,83.929 92.558,85.029 93.658,85.029 94.758,85.029 95.858,85.029 96.958,85.029 92.558,86.129 93.658,86.129 94.758,86.129 95.858,86.129 96.958,86.129
NetB1_1: "Q -1.1" "Q -1.3" "Q -3.1" "Q -3.3" B1.1 B1.14 B2.5 B3.5 B5.5 Q1.2 Q2.2 Q3.2 R1.2 R2.1 R3.1 R4.1 R8.1 | length 58.4
  Top Layer w0.254: v1(70.231,89.916) 71.091,89.056 71.364,89.056 B5.5@71.965,88.454 ; 70.686,93.61 70.686,95.07 v1(71.882,96.266) ; B5.5 B5.5@71.965,88.454 ; B5.5@72.415,88.454 B5.5@71.965,88.454 ; v1(72.644,90.678) 72.644,92.462 72.842,92.66 72.986,92.66 73.211,92.66 73.409,92.858 73.409,93.169 73.924,93.684 74.859,93.684 74.949,93.594 B1.1 ; B1.1@76.095,93.692 Q3.2 77.275,96.055 R8.1 78.211,96.354 78.592,96.735 78.592,96.96 78.79,97.158 79.015,97.158 79.24,97.158 80.19,96.208 81.315,96.208 81.343,96.181 82.643,96.181 R4.1 82.714,96.11 83.782,96.11 R1.2 83.825,95.276 82.884,94.335 82.884,93.692 82.786,93.594 B1.14 ; B2.5 75.578,79.338 74.588,80.328 74.069,80.328 73.796,80.601 Q1.2 73.732,80.587 R2.1 71.051,80.587 R3.1 68.295,81.957 Q2.2 71.735,85.43 71.965,85.66 72.415,85.66 72.4,85.675 72.4,86.056 71.804,86.652 71.804,88.293 B5.5@71.965,88.454
  Bottom Layer w0.254: v1(71.882,96.266) 71.882,91.567 v1(70.231,89.916) 71.882,89.916 v1(72.644,90.678)
NetB1_2: B1.2 B3.2 B5.2 | length 13.8
  Top Layer w0.254: v1(73.66,90.551) 73.66,90.484 73.279,90.103 73.279,89.601 73.707,89.173 74.083,89.173 B5.2@74.152,89.104 ; B5.2@74.221,89.035 73.707,89.035 73.484,88.812 73.484,87.072 74.127,86.429 74.641,86.429 B3.2 ; B1.2 76.442,92.988 77.367,92.988 v1(77.851,93.472)
  Bottom Layer w0.254: v1(73.66,90.551) 73.66,91.295 75.837,93.472 v1(77.851,93.472)
NetB1_3: "Q -1.2" "Q -2.1" B1.3 B4.5 C1.1 L1.2 | length 29.2
  Top Layer w0.254: L1.2 65.913,94.863 66.277,94.499 66.502,94.499 66.727,94.499 67.382,95.155 69.757,95.155 70.215,95.613 B4.5@70.215,96.139 ; B4.5 70.562,96.47 v1(71.628,97.536) ; C1.1 74.988,92.203 75.222,92.203 75.279,92.26 76.363,92.26 B1.3 76.442,92.338 77.733,92.338 78.79,93.395 78.79,95.258 ; v1(77.343,94.869) 77.41,94.869 77.799,95.258 78.79,95.258 ; 79.015,95.258 78.79,95.258
  Bottom Layer w0.254: v1(71.628,97.536) 74.676,97.536 v1(77.343,94.869)
NetB1_4: B1.4 B2.2 B5.1 | length 17.5
  Top Layer w0.254: B5.1 74.359,88.523 75.122,88.523 75.371,88.773 v1(75.438,88.773) 75.391,88.82 75.391,89.2 75.188,89.403 75.188,91.285 75.503,91.6 76.354,91.6 B1.4 ; B2.2 79.537,79.999 80.507,79.999 v1(80.518,80.01)
  Bottom Layer w0.254: v1(75.438,88.773) 75.438,87.249 81.026,81.661 81.026,80.518 v1(80.518,80.01)
NetB1_5: "Q -2.2" B1.5 C6.1 L2.2 R7.1 | length 46
  Top Layer w0.254: 66.502,92.599 66.502,90.195 R7.1 67.565,88.836 67.257,88.836 C6.1 66.565,87.778 66.804,87.778 67.364,87.218 67.364,80.899 70.926,77.338 71.745,77.338 72.969,76.114 72.969,75.875 L2.2 74.944,75.692 78.232,78.98 78.72,78.98 78.943,78.757 80.876,78.757 81.657,79.538 81.657,80.482 78.232,83.907 78.232,87.955 78.024,88.163 78.024,90.288 77.362,90.95 76.442,90.95 B1.5
NetB1_6: B1.6 B2.1 B3.1 | length 17.8
  Top Layer w0.254: B3.1 74.935,85.71 77.583,83.062 78.358,83.062 81.149,80.271 81.149,79.749 80.738,79.338 B2.1 ; B3.1@74.935,85.779 75.293,85.779 75.516,86.002 75.516,86.184 77.516,88.184 77.516,90.077 77.293,90.3 76.442,90.3 B1.6
NetB2_4: B2.4 Q1.1 | length 1.7
  Top Layer w0.254: Q1.1 75.708,80.638 B2.4
NetB3_4: B3.4 Q2.1 | length 3.2
  Top Layer w0.254: Q2.1 70.875,87.33 71.245,86.96 71.296,86.96
NetB4_1: B4.1 B4.8 C2.1 J1.2 | length 24.4
  Top Layer w0.254: v1(66.929,96.774) 66.996,96.774 67.276,96.493 68.161,96.493 B4.1 ; B4.1@68.153,96.774 68.153,98.02 69.184,99.051 B4.8 69.184,103.395 C2.1@69.215,103.426
  Bottom Layer w0.254: J1.2 66.929,83.185 v1(66.929,96.774)
NetB4_9: B4.9 L1.1 | length 4.3
  Top Layer w0.203: L1.1 66.04,102.489 68.453,102.489 68.684,102.258 B4.9
NetB5_4: B5.4 Q3.1 | length 7.2
  Top Layer w0.254: B5.4 72.19,90.283 72.055,90.418 72.055,93.765 74.195,95.905 Q3.1
NetB6_1: B6.1 B6.3 C5.1 L2.1 R7.2 R9.1 | length 27.7
  Top Layer w0.254: v1(68.58,90.297) 68.596,90.281 68.596,89 R7.2 ; v1(68.961,75.819) 68.961,75.784 70.297,74.448 B6.3 70.47,73.975 70.47,73.486 70.789,73.167 73.821,73.167 C5.1 73.966,74.286 R9.1 72.37,74.506 72.197,74.333 B6.1 72.215,74.166 72.215,75.675 L2.1
  Bottom Layer w0.254: v1(68.58,90.297) 68.58,76.267 68.961,75.886 v1(68.961,75.819)
NetB6_4: B6.4 B6.5 C4.1 R6.1 X1.2 | length 11.8
  Top Layer w0.254: B6.4 70.297,70.673 70.847,70.123 71.628,70.123 ; B6.5 71.42,71.475 71.42,70.331 71.628,70.123 ; R6.1 76.507,67.442 76.507,68.702 C4.1 75.951,68.156 X1.2 71.888,69.157 71.888,69.863 71.628,70.123
NetB6_6: B6.6 C5.2 | length 2.3
  Top Layer w0.254: B6.6 72.197,71.948 72.37,72.121 72.941,72.121 73.212,72.392 C5.2
NetB7_3: B7.3 R23.2 U1.12 | length 38.2
  Top Layer w0.254: B7.3 77.602,57.724 77.978,58.099 v1(77.978,58.166) ; R23.2 89.72,80.968 v1(90.297,80.391) 90.344,80.438 90.817,80.438 U1.12
  Bottom Layer w0.254: v1(77.978,58.166) 80.772,60.96 87.645,60.96 92.202,65.517 92.202,78.486 v1(90.297,80.391)
NetB7_4: B7.4 J3.3 J4.3 J5.14 R21.2 U1.42 | length 106.3
  Top Layer w0.203: B7.4 78.102,56.766 v1(79.375,58.039) ; v1(94.869,89.408) 94.904,89.373 94.904,88.519 R21.2 95.008,88.415 U1.42 ; J3.3 103.204,96.041 103.599,96.436 104.037,96.436 104.644,97.043 109.332,97.043 v1(110.49,95.885) 111.669,97.064 114.32,97.064 114.928,96.457 115.366,96.457 115.761,96.062 J4.3
  Bottom Layer w0.203: v1(79.375,58.039) 79.845,58.509 85.876,58.509 89.597,62.23 J5.14 110.461,65.122 110.461,85.246 109.134,86.573 109.134,94.148 110.49,95.504 v1(110.49,95.885) 103.378,88.773 96.848,88.773 96.474,88.398 96.058,88.398 95.684,88.773 95.504,88.773 v1(94.869,89.408)
NetB7_5: B7.5 J3.4 J4.4 J5.13 R22.2 U1.39 | length 46.3
  Top Layer w0.203: U1.39@96.499,87.139 U1.39 96.508,88.433 96.996,88.921 96.996,89.104 97.457,89.564 98.285,89.564 98.76,89.564 99.21,90.014 99.802,90.014 100.955,91.167 100.955,94.739 J3.4
  Top Layer w0.254: B7.5 82.075,56.07 82.202,55.944 98.743,55.944 J5.13 ; J4.4 113.84,94.929 113.84,92.419 R22.2
NetB7_8: B7.8 J2.2 R5.1 X1.1 | length 24.9
  Top Layer w0.254: J2.2 65.151,66.519 71.614,60.056 X1.1 73.556,59.389 77.298,59.389 77.602,59.693 77.602,63.4 R5.1
NetB7_9: B7.9 C3.2 R6.2 | length 10.6
  Top Layer w0.254: v1(77.075,61.976) 77.089,61.962 77.089,60.484 B7.9 ; C3.2 78.693,66.076 78.693,66.374 v1(78.74,66.421) 78.693,66.468 78.381,66.468 R6.2
  Bottom Layer w0.254: v1(77.075,61.976) 77.075,64.756 v1(78.74,66.421)
NetB7_10: B7.10 C3.1 R5.2 | length 4.4
  Top Layer w0.254: C3.1 76.501,64.772 76.501,63.601 R5.2 76.518,61.105 76.579,61.043 76.579,60.493 B7.10
NetB8_1: B8.1 U1.34
NetB8_3: B8.3 J5.6 R26.1 U1.36 | length 40
  Top Layer w0.254: v1(90.043,78.867) 90.11,78.867 90.491,79.248 v1(94.869,79.248) ; U1.36 97.976,86.698 98.569,86.698 98.739,86.868 v1(98.806,86.868) ; v1(108.04,86.958) 108.069,86.987 110.167,86.987 B8.3 110.175,86.399 110.734,85.84 110.734,85.619 R26.1
  Bottom Layer w0.254: J5.6 84.946,69.85 90.043,74.947 v1(90.043,78.867) ; v1(94.869,79.248) 96.024,80.403 96.377,80.403 97.568,81.594 97.568,85.63 v1(98.806,86.868) 98.873,86.868 98.962,86.958 v1(108.04,86.958)
NetB8_4: B8.4 J5.4 U1.31 | length 30.4
  Top Layer w0.254: v1(89.789,66.421) 91.059,66.421 v1(98.933,74.295) ; U1.31 99.8,84.179 v1(99.822,84.201)
  Bottom Layer w0.254: J5.4 86.491,64.77 88.142,66.421 v1(89.789,66.421) ; v1(98.933,74.295) 98.933,77.133 99.822,78.022 v1(99.822,84.201)
NetB8_5: B8.5 R24.1 U1.16 | length 1.7
  Top Layer w0.254: B8.5 112.104,87.659 113.763,87.659 R24.1
NetB9_1: B9.1 R25.2 U1.18
NetBOOT1_2: BOOT1.2 C12.1 Q8.3 R11.1 U1.23 | length 8.4
  Top Layer w0.254: R11.1 100.915,79.737 106.676,79.737 BOOT1.2 106.68,79.443 107.924,78.199 107.924,77.97 C12.1
NetC7_1: C7.1 E1.3 | length 6.8
  Top Layer w0.203: C7.1 113.569,66.822 117.398,62.993 117.506,62.993 117.904,62.595 E1.3
NetC7_2: C7.2 C8.1 | length 1.4
  Top Layer w0.254: C8.1 C7.2
NetC8_2: C8.2 C9.2 U1.2 | length 35.2
  Top Layer w0.254: C9.2@89.078,86.179 C9.2 ; C9.2@89.208,86.049 C9.2 ; U1.2 90.671,86.179 90.364,86.487 v1(90.297,86.487) 90.23,86.487 89.975,86.232 C9.2 ; v1(109.855,69.596) 110.363,69.088 C8.2
  Bottom Layer w0.254: v1(90.297,86.487) 91.796,84.988 91.796,79.611 100.222,71.184 108.267,71.184 v1(109.855,69.596)
NetC13_1: C13.1 R10.1 R12.1 RESET1.2 | length 8.3
  Top Layer w0.254: C13.1 RESET1.2 87.157,89.177 R12.1 87.969,86.895 87.969,86.545 R10.1
NetC14_1: C14.1 Q5.3 R13.1 | length 12.1
  Top Layer w0.254: C14.1 121.592,85.316 Q5.3 128.091,85.444 R13.1
NetC14_2: C14.2 Q6.1 R14.1 | length 12.1
  Top Layer w0.254: Q6.1 117.629,84.396 C14.2 119.782,83.854 124.121,83.854 124.139,83.873 128.478,83.873 R14.1
NetC15_1: C15.1 Q5.1 R15.1 | length 18.1
  Top Layer w0.254: C15.1 116.718,86.942 117.041,86.942 117.32,87.221 119.839,87.221 119.988,87.072 119.988,86.894 120.27,86.613 121.268,86.613 121.55,86.894 121.55,87.072 121.699,87.221 122.396,87.221 122.669,87.494 Q5.1 127.491,87.544 R15.1
NetC15_2: C15.2 Q6.3 R16.1 R20.1 | length 16.7
  Top Layer w0.254: R20.1 116.586,80.876 Q6.3 ; C15.2 116.57,85.842 Q6.3@116.57,82.539 ; Q6.3@116.586,82.539 117.264,83.217 R16.1
NetC18_1: C18.1 C19.1 U2.5 U2.6 | length 4.9
  Top Layer w0.254: C19.1 91.726,89.206 91.726,89.444 91.561,89.609 C18.1 91.744,90.094 92.151,90.094 v1(92.71,89.535) ; v1(92.71,91.186) v1@92.777,91.186 ; U2.6 93.655,90.875 93.088,90.875 v1@92.777,91.186 ; U2.5 92.947,91.356 v1@92.777,91.186
NetC21_1: C21.1 U2.16 | length 0.1
  Top Layer w0.254: C21.1@98.675,90.975 C21.1
NetD1_1: D1.1 U1.11
NetD1_2: D1.2 R19.2 | length 2
  Top Layer w0.254: D1.2 113.7,74.406 R19.2
NetD1_3: D1.3 U1.15
NetD1_4: D1.4 R17.2 | length 1.8
  Top Layer w0.254: R17.2 113.436,71.087 113.436,71.276 113.495,71.334 D1.4
NetD2_3: D2.3 J6.A7 J6.B7 U2.4 | length 7.7
  Top Layer w0.254: D2.3 127.574,94.081 127.868,94.375 127.868,94.514 128.14,94.786 128.441,94.786 v1(129.159,95.504) ; J6.B7 J6.B7@128.544,99.628
  Bottom Layer w0.254: J6.B7 128.468,99.445 128.324,99.301 128.324,99.259 127.694,98.629 127.694,98.278 J6.A7 127.618,97.045 v1(129.159,95.504)
NetD2_4: D2.4 J6.A6 J6.B6 U2.3 | length 9.7
  Top Layer w0.254: D2.4 127.574,92.342 126.918,92.998 126.918,94.771 128.468,96.322 J6.A6 128.468,98.309 128.324,98.453 128.324,98.494 127.694,99.125 127.694,99.476 J6.B6
NetJ5_1: J5.1 U1.10 | length 31.8
  Top Layer w0.203: J5.1 84.669,58.28 84.899,58.509 85.158,58.509 88.392,61.743 v1(88.392,62.992) ; v1(89.408,82.296) 89.488,82.296 89.605,82.179 U1.10
  Bottom Layer w0.203: v1(88.392,62.992) 91.313,65.913 91.313,78.519 89.691,80.14 89.691,80.642 90.046,80.997 90.301,80.997 90.42,81.116 90.42,81.284 v1(89.408,82.296)
NetJ5_2: J5.2 U1.22 | length 26.8
  Top Layer w0.203: U1.22 96.508,80.149 v1(97.028,79.629)
  Top Layer w0.254: J5.2 87.761,62.782 87.761,70.235 v1(95.25,77.724)
  Bottom Layer w0.254: v1(95.25,77.724) 95.714,78.188 96.48,78.188 97.028,78.737 v1(97.028,79.629)
NetJ5_3: J5.3 U1.35 | length 31.6
  Top Layer w0.254: v1(88.519,64.897) 88.519,67.437 v1(97.028,75.946) ; U1.35 98.014,86.123 98.849,86.123 98.993,85.979 v1(99.06,85.979)
  Bottom Layer w0.254: J5.3 87.336,64.897 v1(88.519,64.897) ; v1(97.028,75.946) 99.06,77.978 v1(99.06,85.979)
NetJ5_5: J5.5 R26.2 U1.38 | length 29.1
  Top Layer w0.254: J5.5 86.868,69.509 86.868,70.407 94.189,77.728 94.189,78.314 v1(94.234,78.359) ; U1.38 97.008,87.749 97.27,88.011 v1(97.282,88.011) ; v1(108.865,86.132) 108.912,86.085 109.368,86.085 R26.2
  Bottom Layer w0.254: v1(94.234,78.359) 94.231,78.362 94.231,84.148 94.586,84.502 94.976,84.502 95.331,84.857 95.331,86.822 95.758,87.249 96.647,87.249 97.108,87.71 97.108,87.77 97.282,87.944 v1(97.282,88.011)
NetJ5_9: J5.9 U1.14 | length 18.2
  Top Layer w0.203: U1.14 92.508,80.615 92.581,80.541 92.581,80.478 93.092,79.967 94.86,79.967 95.371,79.456 95.371,78.35 98.791,74.93 J5.9
NetJ5_10: J5.10 U1.24 | length 15.6
  Top Layer w0.203: U1.24 99.129,80.729 99.64,81.241 101.639,81.241 v1(102.616,80.264)
  Bottom Layer w0.203: v1(102.616,80.264) 102.616,78.32 107.417,73.52 107.417,72.542 J5.10
NetJ5_11: J5.11 U1.41 U2.20 | length 40.3
  Top Layer w0.254: U1.41 95.508,88.904 v1(96.139,89.535) ; U2.20 96.198,94.989 96.266,95.056 v1(96.266,95.123) ; v1(103.505,74.041) 103.552,73.994 103.552,73.867 J5.11 ; v1(103.505,89.789) 103.505,86.681 103.632,86.554 v1(103.632,86.487)
  Bottom Layer w0.254: v1(96.266,95.123) 96.266,93.327 96.525,93.068 96.525,89.921 v1(96.139,89.535) 97.415,89.535 97.561,89.389 103.038,89.389 103.438,89.789 v1(103.505,89.789) ; v1(103.505,74.041) 102.089,75.457 102.089,84.944 v1(103.632,86.487)
NetJ5_12: J5.12 U1.40 U2.21 | length 54.2
  Top Layer w0.203: U1.40 96.008,87.661 95.988,87.682 95.988,88.541 96.266,88.82 v1(96.266,88.9) 97.431,90.065 v1(98.552,90.065) ; v1(102.616,90.424) 107.87,90.424 108.124,90.678 v1(109.728,90.678) ; J5.12 108.966,65.913 v1(111.506,65.913)
  Top Layer w0.254: v1(95.504,95.123) 95.504,95.056 95.698,94.862 U2.21
  Bottom Layer w0.203: v1(95.504,95.123) 95.497,95.116 95.497,89.468 96.008,88.957 96.209,88.957 v1(96.266,88.9) ; v1(98.552,90.065) 100.295,90.065 100.445,89.916 102.108,89.916 v1(102.616,90.424) ; v1(109.728,90.678) 111.506,88.9 v1(111.506,65.913)
NetJ6_A5: J6.A5 R30.1 | length 3.2
  Top Layer w0.254: J6.A5 129.326,98.194 129.326,97.496 R30.1
NetJ6_B5: J6.B5 R29.1 | length 16.4
  Top Layer w0.254: R29.1 125.751,94.536 125.94,94.536 126.259,94.217 126.259,93.351 126.036,93.128 123.944,93.128 122.887,94.184 122.887,100.276 123.374,100.763 125.706,100.763 126.624,99.844 126.624,99.803 126.768,99.659 J6.B5
NetLS1_N: LS1.N Q4.3 R18.1 | length 13.6
  Top Layer w0.254: R18.1 117.636,76.997 Q4.3 117.786,78.105 120.592,80.911 LS1.N
NetLS1_P: LS1.P R13.2 R14.2 R15.2 R16.2 R18.2 U1.21 | length 28.3
  Top Layer w0.254: R18.2 120.577,74.607 125.473,69.711 LS1.P 126.873,77.371 R15.2 R13.2 R14.2 R16.2
NetQ4_1: Q4.1 R20.2
NetQ7_1: Q7.1 R31.2 | length 2.8
  Top Layer w0.254: R31.2 89.453,91.752 Q7.1
NetQ7_2: Q7.2 R12.2 U1.9 | length 7.7
  Top Layer w0.254: R12.2 90.14,88.166 92.211,88.166 92.949,88.904 92.971,88.904 93.341,89.274 93.341,89.796 92.971,90.166 92.83,90.166 91.764,91.233 91.722,91.233 91.449,91.506 Q7.2
NetQ7_3: Q7.3 R32.1 U2.19 | length 3.8
  Top Layer w0.254: R32.1 87.58,93.756 Q7.3
NetQ8_1: Q8.1 R32.2 | length 1.5
  Top Layer w0.254: Q8.1 85.537,95.574 86.041,95.07 R32.2
NetQ8_2: Q8.2 R31.1 U2.23 | length 16
  Top Layer w0.254: R31.1 86.741,93.308 86.392,93.657 85.837,93.657 84.86,94.634 84.86,96.33 85.081,96.551 86.76,96.551 87.437,95.874 Q8.2 ; Q8.2@87.437,95.674 87.71,95.401 93.418,95.401 94.68,94.139 94.68,93.9 U2.23
"NetQ -2_3": "Q -2.3" "Q -3.2" | length 2.9
  Top Layer w0.254: 68.802,93.549 69.027,93.549 70.263,92.313 70.263,91.908 70.461,91.71 70.686,91.71
NetR27_1: R27.1 U1.27 | length 6
  Top Layer w0.254: U1.27 98.562,82.179 R27.1
NetR27_2: R27.2 U2.9
NetR28_1: R28.1 U1.13 U2.17 | length 2.4
  Top Layer w0.254: U2.17 98.557,92.856 R28.1
VBUS: C20.1 D2.5 J6.A4 J6.A9 J6.B4 J6.B9 R1.1 U2.7 U2.8 | length 41
  Top Layer w0.254: R1.1 83.855,96.997 94.076,96.997 v1(94.107,97.028) ; 93.98,89.408 93.98,89.457 94.198,89.675 U2.7 U2.8 ; C20.1 125.918,96.271 J6.A9 ; D2.5 129.476,91.486 132.62,94.629 132.62,96.191 131.761,97.05 131.172,97.05 130.244,97.978 130.244,98.126 J6.A4
  Bottom Layer w0.254: 93.98,89.408 94.107,89.535 v1(94.107,97.028) ; J6.A9 J6.B4 125.994,99.628 125.994,99.776 126.476,100.258 129.611,100.258 130.024,99.844 130.024,99.803 130.168,99.659 J6.B9 J6.A4
pads on no net: B1.8 B1.9 B1.10 B1.11 B1.12 B1.13 D2.1 E1.1 E1.4 J3.MP1 J3.MP2 J4.MP1 J4.MP2 J5.15 J6.A8 J6.B8 U1.5 U1.6 U1.7 U1.8 U1.17 U1.20 U1.25 U1.26 U1.28 U1.29 U1.30 U1.32 U1.33 U1.44 U1.45 U1.47 U1.48 U2.1 U2.10 U2.11 U2.12 U2.13 U2.14 U2.15 U2.18 U2.22 U2.24 U2.25
copper on no net:
  other v2: 94.898,91.556 95.998,91.556 94.898,92.656 95.998,92.656

## Polygon pours and split planes (outlines as drawn)
3V3 on VCC "3V3_L02_P000" (solid, pour order 0): 62.992,104.648 63.119,104.521 132.842,104.521 132.842,54.61 62.865,54.61 62.865,104.521
GND on GND "GND_L03_P001" (solid, pour order 1): 62.865,104.648 132.588,104.648 132.588,54.864 132.715,54.737 132.588,54.61 62.611,54.61
GND on Top Layer "GND_L01_P003" (solid, pour order 3): 62.992,104.648 132.969,104.648 132.969,69.025 132.969,54.61 62.992,54.61

## Text inside footprints (layer, text, board x,y; h text height)
J6: Mechanical 13 "PCB EDGE" at 122.728,104.132 h0.81 r180
LS1: Top Overlay "-" at 126.173,82.911 h1.27 r90; Top Overlay "+" at 126.173,67.711 h1.27 r90; Mechanical 13 "-" at 126.173,82.911 h1.27 r90; Mechanical 13 "+" at 126.173,67.711 h1.27 r90
Q1: Mechanical 9 "SOT-23" at 76.162,79.851 h0.5 r180
Q2: Mechanical 9 "SOT-23" at 69.095,87.796 h0.5 r270
Q3: Mechanical 9 "SOT-23" at 73.729,96.855 h0.5
Q4: Mechanical 9 "SOT-23" at 116.336,79.521 h0.5 r270
Q5: Mechanical 9 "SOT-23" at 123.135,86.743 h0.5 r180
Q6: Mechanical 9 "SOT-23" at 118.002,83.689 h0.5 r180
Q7: Mechanical 9 "SOT-23" at 89.083,92.456 h0.5
Q8: Mechanical 9 "SOT-23" at 85.071,96.524 h0.5